# Altium PCB Base_PCB1.PcbDoc (part 2 of 2)
Units mm, origin at the board's own origin, x right, y up, seen from the top; angles counter-clockwise.
Board outline 100 x 100 mm, 4 copper layers (Top, Mid1, Mid2, Bottom), stack 1.746 mm thick; 70 components, 46 nets, 250 pads, 246 vias.
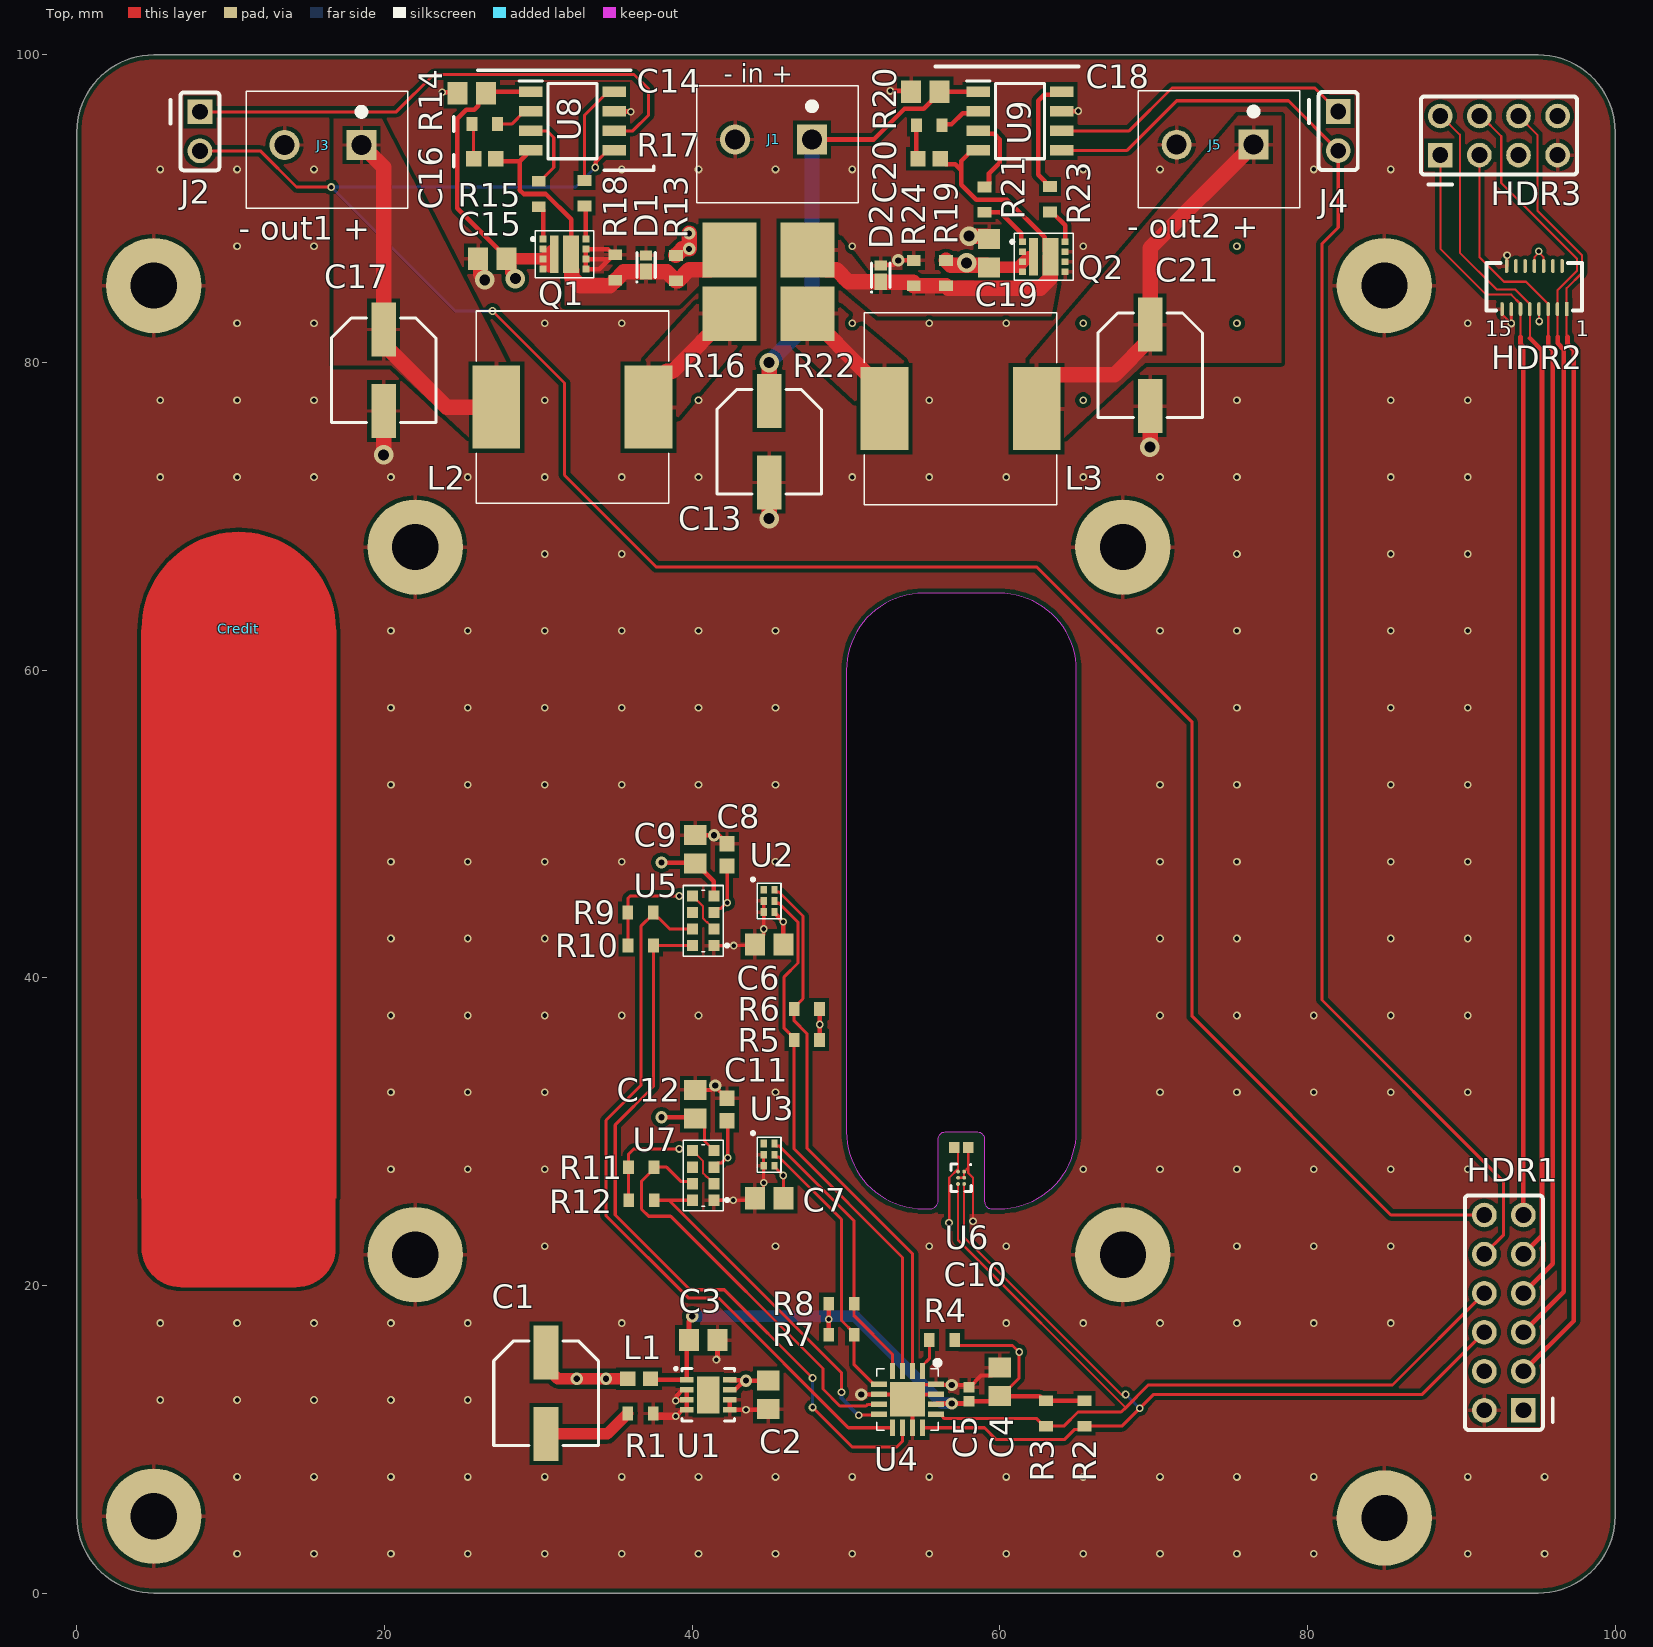
[diagram p0: Top view]

## Silkscreen, mask and mechanical layers (free items; w line width, h text height) (continued)
Top Overlay: (continued)
  lines w0.254: 24.5,92.75 24.5,93.5 ; 24.5,95.05 24.5,95.95 ; 26.066,99 36,99 ; 34.3,92.5 37.5,92.5 37.5,92.75 ; 55.822,99.235 65.105,99.235
  text "- in +" at 42.056,98.194 h1.2
  text "- out2 +" at 68.287,88.104 h1.52
  text "- out1 +" at 10.509,87.997 h1.52
Dimensions:
  the board outline again, w0.01

## Text inside footprints (layer, text, board x,y; h text height)
Credit: Top "Malte Nilges" at 11.578,56.796 h2.2 r270; Top "01-2024" at 7.212,56.248 h2.2 r270; Top Solder "01 / 2024" at 5.802,41.048 h1.3 r270
HDR2: Top Overlay "1" at 97.45,81.723 h1; Top Overlay "15" at 91.55,81.723 h1